# EAGLE board UsbAsp_IR-Gross-41 (EAGLE 6.3)
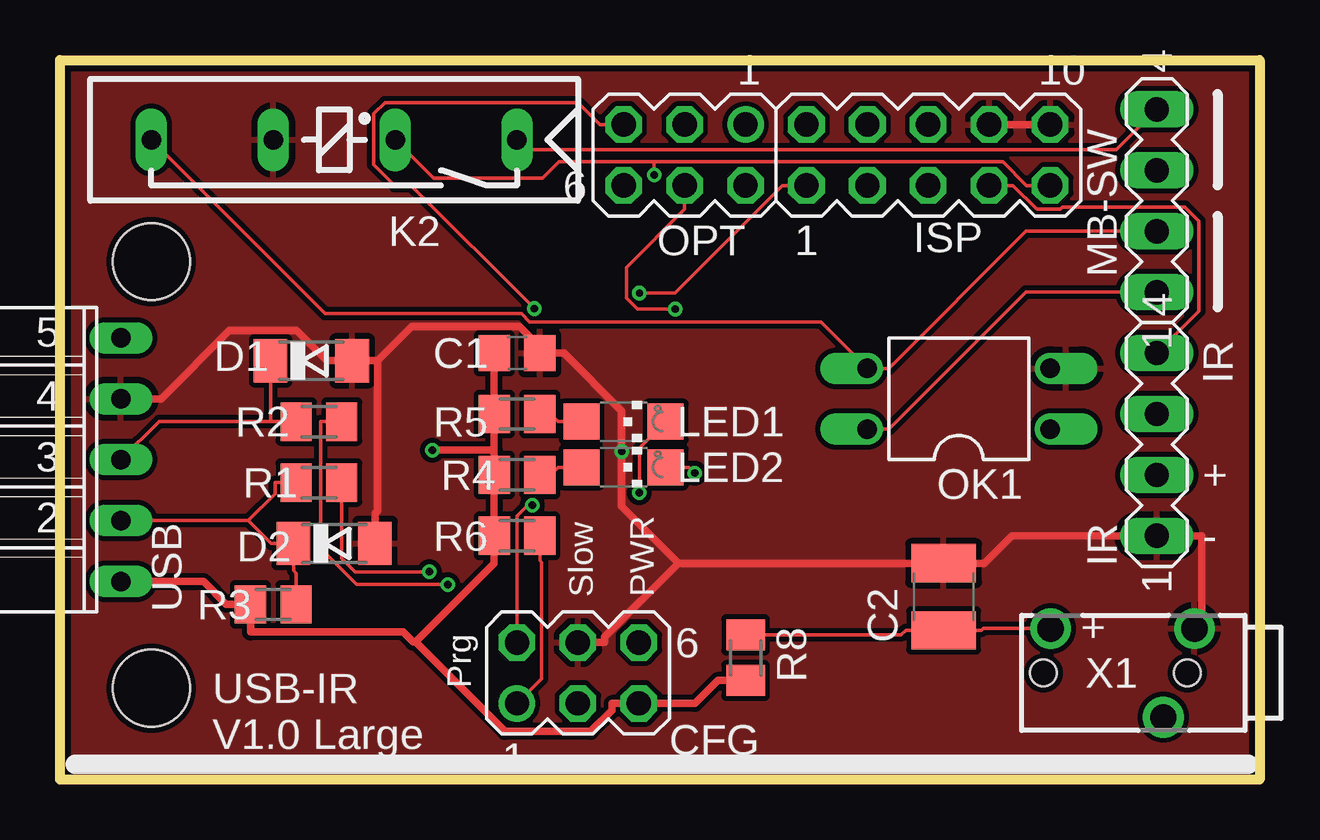
[diagram p0: board, top side]
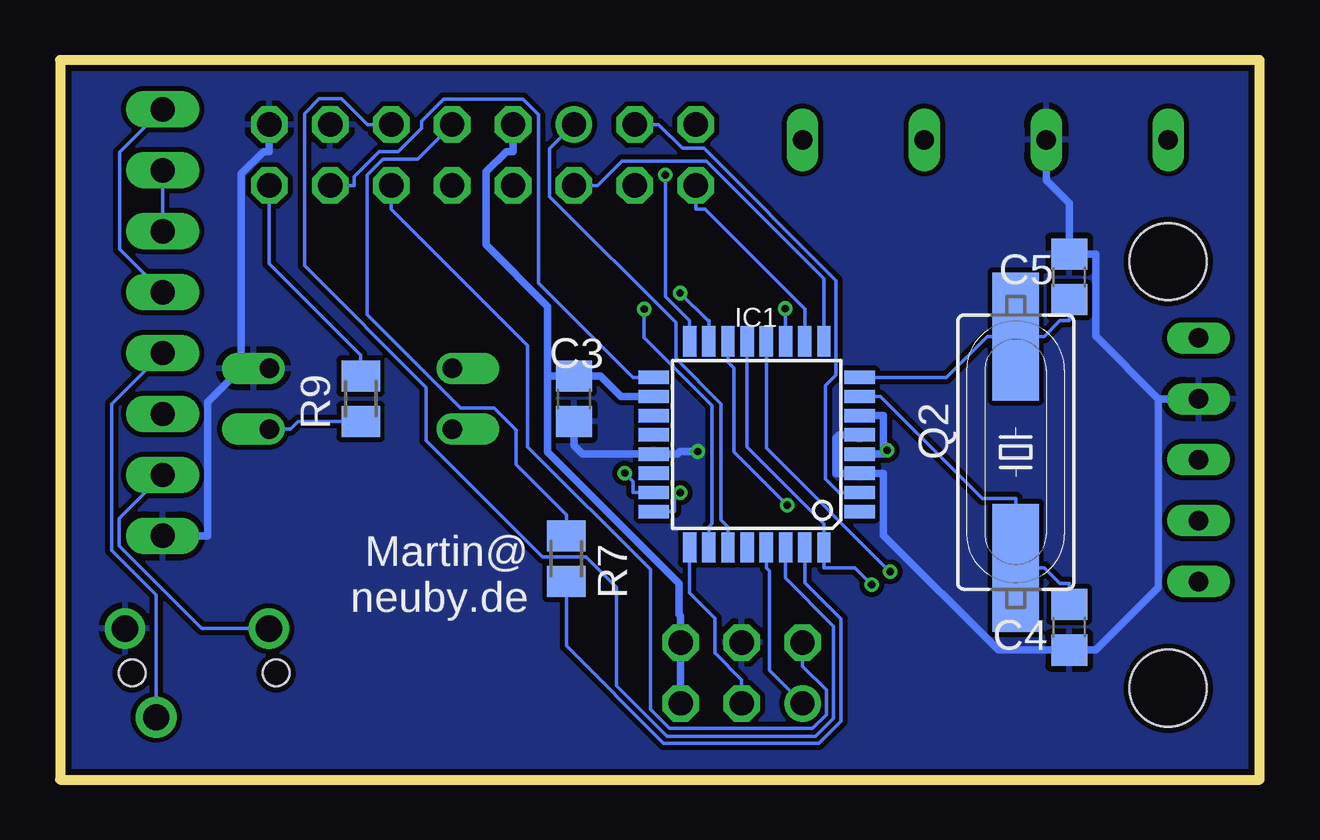
[diagram p1: board, bottom side, seen from below]

Size 50 x 30 mm. Coordinates in mm from the lower left corner, seen from the top.
Outline: 0,0 0,30 50,30 50,0 0,0
Copper layers (1*16): Top 0.035mm / dielectric 1.5mm / Bottom 0.035mm
Design rules "Fusion_eagle_rule_v1.1": minimum track width 6mil, minimum drill 12mil, track to track 6mil, track to pad 6mil, pad to pad 6mil, via to via 6mil, smd to smd 0mil, copper to edge 10mil, drill to drill 10mil, minimum pad ring 10mil, minimum via ring 6mil, stop-mask expansion 2mil, vias tented up to drill 100mil, thermal gap 10mil
Net classes: 1 Power: width 0.305 mm, clearance 0.203 mm
Holes 3.2 mm at 3.81,3.81 3.81,21.59

## Footprints (pad centres in the part's own frame; a part is rotated, then mirrored left to right if it is on the bottom)
C0805 = smd 1.3 x 1.5: 1 -0.95,0; 2 0.95,0
C1210 = smd 1.6 x 2.7: 1 -1.4,0; 2 1.4,0
MA03-2 = drill 1.016: 1 -2.54,-1.27 | drill 1.016 octagon: 2 -2.54,1.27; 3 0,-1.27; 4 0,1.27; 5 2.54,-1.27; 6 2.54,1.27
SOD80C = smd 1.4 x 1.8: A 1.7,0; C -1.7,0
TQFP32-08 = smd 1.27 x 0.559: 1 -4.293,2.8; 2 -4.293,2; 3 -4.293,1.2; 4 -4.293,0.4; 5 -4.293,-0.4; 6 -4.293,-1.2; 7 -4.293,-2; 8 -4.293,-2.8; 17 4.293,-2.8; 18 4.293,-2; 19 4.293,-1.2; 20 4.293,-0.4; 21 4.293,0.4; 22 4.293,1.2; 23 4.293,2; 24 4.293,2.8 | smd 0.559 x 1.27: 9 -2.8,-4.293; 10 -2,-4.293; 11 -1.2,-4.293; 12 -0.4,-4.293; 13 0.4,-4.293; 14 1.2,-4.293; 15 2,-4.293; 16 2.8,-4.293; 25 2.8,4.293; 26 2,4.293; 27 1.2,4.293; 28 0.4,4.293; 29 -0.4,4.293; 30 -1.2,4.293; 31 -2,4.293; 32 -2.8,4.293
MA04-1 = drill 1.016 long: 1 -3.81,0; 2 -1.27,0; 3 1.27,0; 4 3.81,0
MA05-2 = drill 1.016 octagon: 1 -5.08,-1.27; 2 -5.08,1.27; 3 -2.54,-1.27; 4 -2.54,1.27; 5 0,-1.27; 6 0,1.27; 7 2.54,-1.27; 8 2.54,1.27; 9 5.08,-1.27; 10 5.08,1.27
REED = drill 0.813 long: 1 -17.78,2.54; 3 -12.7,2.54; 5 -7.62,2.54; 7 -2.54,2.54
CHIPLED_1206 = smd 1.5 x 1.5: A 0,-1.75; C 0,1.75
DIL04 = drill 0.813 offset: 1 -1.27,-3.81; 2 1.27,-3.81; 3 1.27,3.81; 4 -1.27,3.81
HC49UP = smd 5.334 x 1.93: 1 -4.826,0; 2 4.826,0
M0805 = smd 1.3 x 1.6: 1 -0.95,0; 2 0.95,0
FE05W = drill 0.813 long: 1 -5.08,0; 2 -2.54,0; 3 0,0; 4 2.54,0; 5 5.08,0
1501_03 = drill 1.1 pad 1.7: 1 -1.85,0.3; 2 1.85,-1; 3 -1.85,-5.7 | hole 1.1: 0,0; 0,-6

## Placement (x,y rotation side)
C1  4u7  [C0805]  19.05,17.78 0 top
C2  10uF  [C1210]  36.83,7.62 90 top
C3  100n  [C0805]  28.57,15.88 270 bottom
C4  22p  [C0805]  7.94,6.35 90 bottom
C5  22p  [C0805]  7.94,20.95 270 bottom
CFG  [MA03-2]  21.59,4.45 0 top
D1  3V6  [SOD80C]  10.48,17.46 0 top
D2  3V6  [SOD80C]  11.43,9.84 0 top
IC1  MEGA48A-AU  [TQFP32-08]  20.95,13.97 180 bottom
IR  [MA04-1]  45.72,13.97 90 top
ISP  [MA05-2]  36.2,26.04 0 top
K2  35701331  [REED]  1.27,29.21 180 top
LED1  green  [CHIPLED_1206]  23.5,14.92 270 top
LED2  red  [CHIPLED_1206]  23.5,13.02 270 top
MB-SW  [MA04-1]  45.72,24.13 90 top
OK1  PC817  [DIL04]  37.47,15.88 90 top
OPT  [MA03-2]  26.04,26.04 180 top
Q2  [HC49UP]  10.16,13.65 90 bottom
R1  68  [M0805]  10.79,12.38 0 top
R2  68  [M0805]  10.79,14.92 0 top
R3  2k2  [M0805]  8.89,7.3 0 top
R4  1k  [M0805]  19.05,12.7 0 top
R5  1k  [M0805]  19.05,15.24 0 top
R6  10k  [M0805]  19.05,10.16 0 top
R7  1k  [M0805]  28.89,9.21 270 bottom
R8  560  [M0805]  28.57,5.08 270 top
R9  560  [M0805]  37.47,15.88 90 bottom
USB  [FE05W]  2.54,13.34 90 top
X1  1501_03  [1501_03]  46.99,4.45 270 top

## Library data of the parts
C1-C5 R1-R9 = rcl
CFG IR ISP MB-SW OPT = con-lstb; OC_FARNELL: unknown; OC_NEWARK: unknown
D1 D2 = diode
IC1 = atmel
K2 = relay; OC_FARNELL: unknown; OC_NEWARK: unknown
LED1 LED2 = led
OK1 = optocoupler; MPN: PC817X4J000F; OC_FARNELL: 9707727; OC_NEWARK: 97K7059
Q2 = crystal
USB = con-lsta; OC_FARNELL: unknown; OC_NEWARK: unknown
X1 = con-lumberg; OC_FARNELL: 1200127; OC_NEWARK: unknown

## Nets
+5V [Power]: C1.1 C3.1 CFG.5 CFG.6 IC1.4 IC1.6 IC1.18 ISP.2 R3.1 R4.1 R5.1 R6.1 R8.2 USB.1
ADC6: IC1.19
D+: D1.C R2.1 USB.3
D-: D2.C R1.1 R3.2 USB.2
GND [Power]: C1.2 C2.2 C3.2 C4.1 C5.1 CFG.4 D1.A D2.A IC1.3 IC1.5 IC1.21 IR.1 ISP.8 ISP.10 K2.5 OK1.2 USB.4 X1.1
MISO: IC1.16 ISP.9 K2.3 R9.2
MOSI: IC1.15 ISP.1
N$1: OK1.1 R9.1
N$2: CFG.3 IC1.25
N$4: C2.1 IR.2 R8.1 X1.3
N$6: IC1.31 R7.2
N$7: IC1.13 IC1.32 R2.2
N$13: LED2.A R4.2
N$14: IC1.23 LED2.C
N$15: IC1.24 LED1.C
N$16: IC1.12 R1.2
N$21: IC1.1
N$22: C4.2 IC1.7 Q2.1
N$23: C5.2 IC1.8 Q2.2
N$25: LED1.A R5.2
PB2-RST: CFG.2 IC1.14 ISP.5
PC3: IC1.26 OPT.4
PC4: IC1.27 OPT.1
PC5: IC1.28
PD4: IC1.2 OPT.3
PD5: IC1.9 OPT.2
PD6: IC1.10 OPT.6
PD7: IC1.11 OPT.5
RST: CFG.1 IC1.29 R6.2
RX: IC1.30 ISP.6
SCK: IC1.17 IR.4 ISP.7 X1.2
SW1: K2.1 MB-SW.1 MB-SW.4 OK1.4
SW2: K2.7 MB-SW.2 MB-SW.3 OK1.3
TX: ISP.4 R7.1

## Tracks (layer width: path | path; a pad name or v marks a point on that pad's centre or on a via)
+5V  (via drill 0.3 pad 0.61)
  Top 0.305: 14.82,5.73 | 14.82,5.73 14.71,5.73 14.29,6.15 7.94,6.15 R3.1 6.93,7.3 5.98,8.26 USB.1 | 14.82,5.73 18.1,9 R6.1 R4.1 18.1,13.73 | 14.82,5.73 18.55,2 22.12,2 23.01,2.9 23.01,3.17 CFG.5 26.46,3.17 27.42,4.13 R8.2 | 18.1,13.73 R5.1 C1.1 | 18.1,13.73 v15.52,13.73
  Bottom 0.305: ISP.2 31.11,26.19 31.39,26.19 32.24,25.34 32.24,22.29 29.68,19.73 29.68,16.82 | 29.68,16.82 29.68,13.66 24.19,8.17 24.19,6.9 24.13,6.83 CFG.6 CFG.5 | 29.68,16.82 C3.1 27.47,16.82 26.61,15.97 IC1.18 | IC1.6 15.67,15.17 15.67,13.89 v15.52,13.73 15.67,13.58 15.67,13.57 IC1.4
D+
  Top 0.152: 8.78,14.92 R2.1 | USB.3 4.13,14.92 8.78,14.92 | 8.78,14.92 D1.C
D-
  Top 0.152: 7.85,10.79 8.8,9.84 D2.C 9.73,8.71 9.84,8.6 R3.2 | USB.2 7.85,10.79 | 7.85,10.79 8.97,11.91 8.97,12.38 R1.1
GND  (via drill 0.3 pad 0.61)
  Top 0.305: 25.78,9.02 23.41,11.39 v23.41,13.68 23.41,15.37 21.01,17.78 C1.2 20,18.33 19.71,18.33 19.16,18.89 14.66,18.89 13.23,17.46 | USB.4 4.22,15.88 7.06,18.72 9.87,18.72 11.12,17.46 D1.A 13.23,17.46 | 13.23,17.46 13.23,11.2 13.13,11.1 D2.A | X1.1 47.6,6.61 47.6,10.16 IR.1 39.68,10.16 38.54,9.02 C2.2 25.78,9.02 | 25.78,9.02 22.71,5.95 22.71,5.71 CFG.4 | ISP.10 ISP.8
  Bottom 0.305: v23.41,13.68 24.15,13.68 24.26,13.57 IC1.21 28.23,13.57 28.57,13.92 C3.2 | 4.22,15.88 4.22,8.02 6.83,5.4 C4.1 10.89,5.4 15.67,10.18 15.67,12.77 IC1.3 17.65,12.77 17.65,14.24 17.53,14.37 IC1.5 | 4.22,15.88 4.09,15.88 USB.4 | 4.22,15.88 6.83,18.49 6.83,21.91 C5.1 7.94,24.04 8.89,24.99 K2.5 | 42.44,17.14 42.44,25.25 41.51,26.19 41.27,26.19 ISP.10 | 42.44,17.14 43.84,15.75 43.84,10.16 IR.1 | OK1.2 42.44,17.14
  pour Top: -2.54,-2.54 -2.54,33.02 53.34,33.02 53.34,-2.54
  pour Bottom: 0,0 0,30.48 50.8,30.48 50.8,0
MISO  (via drill 0.3 pad 0.61)
  Top 0.152: 24.77,25.76 v24.77,25.21 | 24.77,25.76 20.8,25.76 20.11,25.07 15.57,25.07 K2.3 | 24.77,25.76 39.29,25.76 40.28,24.77 ISP.9
  Bottom 0.152: R9.2 37.47,17.7 41.27,21.51 ISP.9 | IC1.16 23.75,19.13 24.77,20.14 v24.77,25.21
MOSI  (via drill 0.3 pad 0.61)
  Top 0.152: ISP.1 30.12,24.77 25.64,20.28 v24.15,20.28
  Bottom 0.152: IC1.15 22.95,19.13 23,19.13 v24.15,20.28
N$1
  Bottom 0.152: OK1.1 40.39,14.61 40.07,14.93 R9.1
N$2
  Bottom 0.152: CFG.3 21.59,4.17 22.7,5.27 22.7,6.73 23.75,7.79 IC1.25
N$4
  Top 0.152: R8.1 35.06,6.03 35.25,6.22 C2.1 38.41,6.22 38.48,6.29 X1.3
  Bottom 0.152: IR.2 47.54,10.88 47.54,9.74 44.09,6.29 X1.3
N$6
  Bottom 0.152: IC1.31 18.95,8.21 17.45,6.7 17.45,2.43 18.38,1.5 24.83,1.5 28.89,5.56 R7.2
N$7  (via drill 0.3 pad 0.61)
  Top 0.152: v16.17,8.13 12.37,8.13 10.87,9.64 10.87,14.92 R2.2
  Bottom 0.152: IC1.13 21.36,17.4 21.36,13.86 18.16,10.66 18.16,10.54 IC1.32 18.16,8.81 16.85,8.81 v16.17,8.13
N$13
  Top 0.152: LED2.A 20.77,13.02 20.45,12.7 R4.2
N$14  (via drill 0.3 pad 0.61)
  Top 0.152: v26.46,12.78 26.22,13.02 LED2.C
  Bottom 0.152: v26.46,12.78 26.11,12.43 26.11,11.97 IC1.23
N$15  (via drill 0.3 pad 0.61)
  Top 0.152: v24.15,11.95 24.15,13.82 LED1.C
  Bottom 0.152: v24.15,11.95 24.38,11.71 24.38,11.17 IC1.24
N$16  (via drill 0.3 pad 0.61)
  Top 0.152: R1.2 11.74,9.22 12.3,8.66 v15.4,8.66
  Bottom 0.152: IC1.12 20.55,17.4 20.55,13.82 v15.4,8.66
N$22
  Bottom 0.152: IC1.7 15.8,15.97 11.55,11.72 10.16,11.72 Q2.1 8.97,8.83 8.32,8.18 7.94,8.18 C4.2
N$23
  Bottom 0.152: IC1.8 13.06,16.77 11.35,18.48 Q2.2 8.97,18.48 8.32,19.13 7.94,19.13 C5.2
N$25
  Top 0.152: LED1.A 20.77,14.92 20.45,15.24 R5.2
PB2-RST  (via drill 0.3 pad 0.61)
  Top 0.152: CFG.2 19.05,10.98 19.51,11.44 v19.69,11.44
  Bottom 0.152: v19.69,11.44 21.91,13.66 21.91,17.16 22.16,17.4 IC1.14 | ISP.5 36.2,23.77 30.51,18.09 30.51,13.87 25.39,8.75 25.39,2.93 24.58,2.13 18.63,2.13 18.06,2.7 18.06,3.73 19.05,4.72 CFG.2
PC3  (via drill 0.3 pad 0.61)
  Top 0.152: v25.65,19.61 24.06,19.61 23.61,20.07 23.61,21.35 26.04,23.77 OPT.4
  Bottom 0.152: v25.65,19.61 25.65,18.44 22.82,15.6 22.82,10.68 22.95,10.54 IC1.26
PC4
  Bottom 0.152: IC1.27 22.16,10.54 22.45,10.83 22.45,15.66 24.33,17.55 24.33,19.05 29.59,24.3 29.59,26.29 OPT.1
PD4
  Bottom 0.152: IC1.2 17.53,11.97 18.1,12.54 18.1,16.43 17.65,16.88 17.65,20.8 23.16,26.31 24.05,26.31 25.04,27.3 OPT.3
PD5
  Bottom 0.152: OPT.2 27.58,24.77 26.58,25.77 23.05,25.77 18.16,20.88 IC1.9
PD6
  Bottom 0.152: OPT.6 23.5,23.77 23.12,23.77 18.95,19.61 IC1.10
PD7  (via drill 0.3 pad 0.61)
  Top 0.152: v19.77,19.64 14.64,24.77 13.95,24.77 13.08,25.64 13.08,27.75 13.54,28.22 21.59,28.22 22.5,27.3 OPT.5
  Bottom 0.152: IC1.11 19.75,19.61 v19.77,19.64
RST
  Top 0.152: R6.2 20,9.13 20.07,9.06 20.07,4.2 CFG.1
  Bottom 0.152: IC1.29 20.55,8.81 20.44,8.7 20.44,4.56 CFG.1
RX
  Bottom 0.152: IC1.30 19.75,8.4 17.75,6.39 17.75,2.56 18.5,1.81 24.71,1.81 26.81,3.91 26.81,8 28.08,9.28 29.88,9.28 34.73,14.13 34.73,16.35 39.8,21.42 39.8,27.76 39.19,28.38 38.26,28.38 37.19,27.3 ISP.6
SCK
  Top 0.152: ISP.7 39.73,24.77 40.72,23.77 41.69,23.77 41.78,23.87 46.88,23.87 47.47,23.27 47.47,19.53 IR.4
  Bottom 0.152: IC1.17 26.11,16.77 30.05,20.71 30.05,27.72 30.7,28.37 34.01,28.37 34.92,27.45 34.92,27.16 35.9,26.19 36.69,26.19 37.74,25.14 37.74,24.77 ISP.7 | X1.2 45.99,7.69 47.85,9.55 47.85,15.65 IR.4
SW1
  Top 0.152: OK1.4 34.54,14.61 40.26,20.32 MB-SW.1 | MB-SW.4 44.03,26.25 19.47,26.25 K2.1
  Bottom 0.152: MB-SW.1 47.51,22.11 47.51,26.15 MB-SW.4
SW2
  Top 0.152: K2.7 11.06,19.42 19.23,19.42 19.58,19.08 31.72,19.08 OK1.3 34.54,17.14 40.26,22.86 MB-SW.2
  Bottom 0.152: MB-SW.3 MB-SW.2
TX
  Bottom 0.152: ISP.4 35.1,25.86 36.53,25.86 37.2,25.19 37.2,19.39 33.31,15.49 31.92,15.49 31,14.57 31,13.14 28.89,11.04 R7.1

## Text on the board
tPlace: Slow | PWR | Prg
tNames: IR | + | - | + | USB-IR / V1.0 Large
bNames: Martin@ / neuby.de